# Altium PCB DS134-1.1-B色度传感器.PcbDoc
Units mm, origin at the board's own origin, x right, y up, seen from the top; angles counter-clockwise.
Board outline 42 x 29 mm, 2 copper layers (Top Layer, Bottom Layer), stack 1.671 mm thick; 1 components, 5 nets, 12 pads, 3 vias.
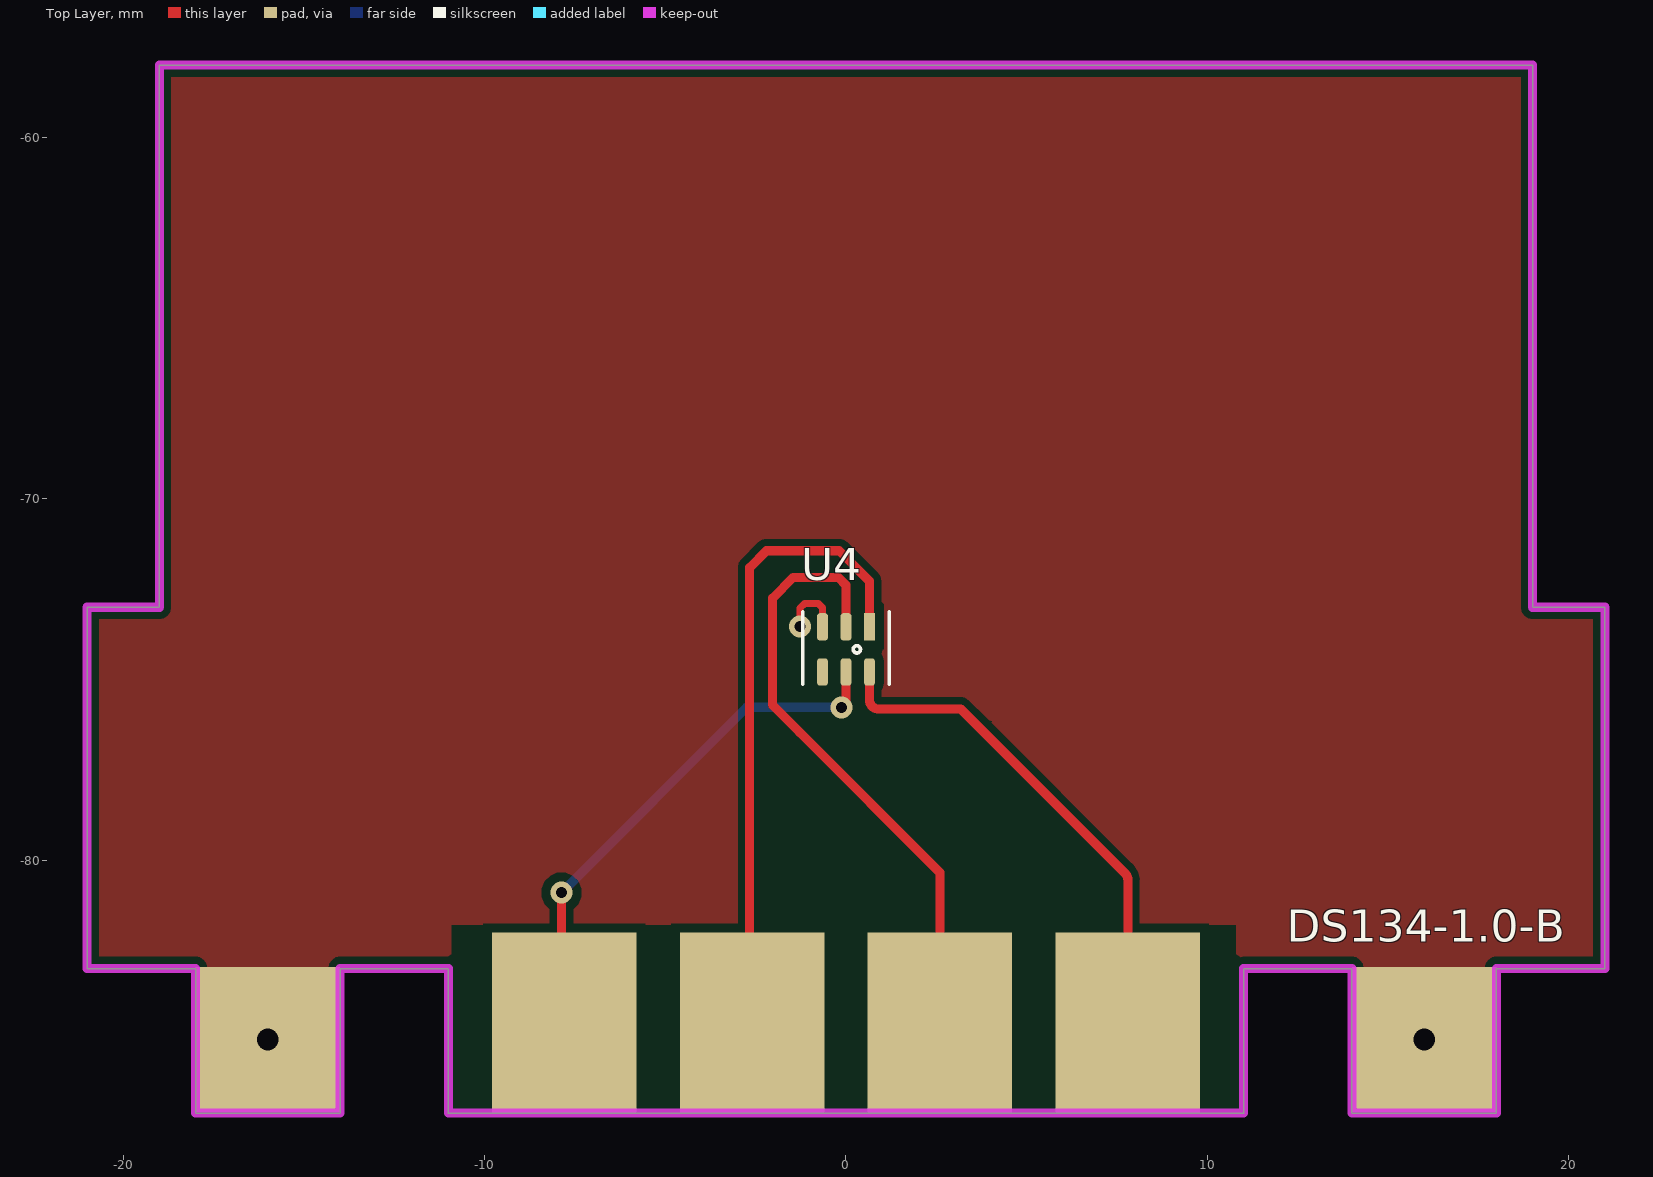
[diagram p0: Top Layer view]
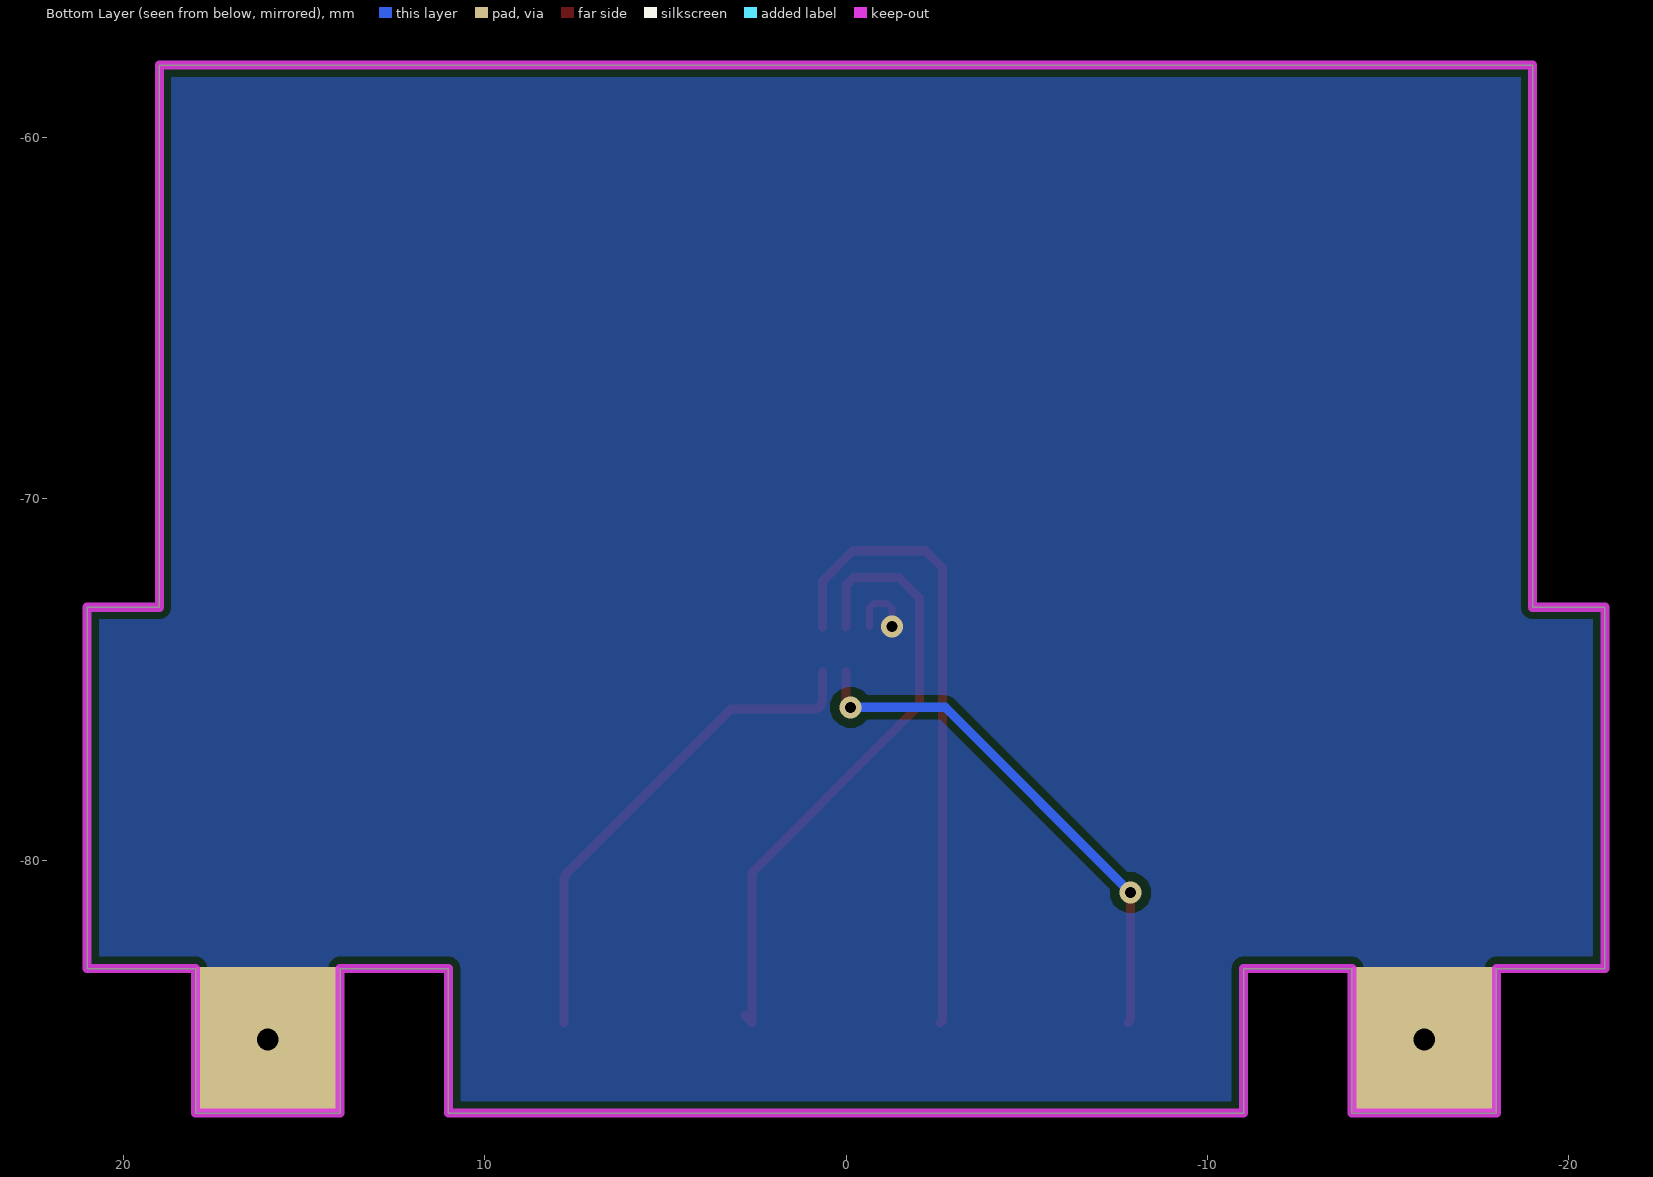
[diagram p1: Bottom Layer view, seen from below]

## Layer stack, top to bottom
Top Solder: solder mask 0.0102, Solder Resist, Dk 3.5
Top Layer: signal copper 0.0356
Dielectric 1: dielectric 1.6, FR-4, Dk 4.8
Bottom Layer: signal copper 0.0356
Bottom Solder: solder mask 0.0102, Solder Resist, Dk 3.5

## Board outline
-21,-83 -18,-83 -18,-87 -14,-87 -14,-83 -11,-83 -11,-87 11,-87 11,-83 14,-83 14,-87 18,-87 18,-83 21,-83 21,-73 19,-73 19,-58 -19,-58 -19,-73 -21,-73

## Design rules (kind name [scope] priority, off if disabled: settings)
Clearance [All] p1: gap=0.2 ignorepadtopadclearanceinfootprint=FALSE except(0: Arc-Hole Track-Hole SMDPad-Hole THPad-Hole Via-Hole Fill-Hole Poly-Hole Region-Hole Text-Hole; 0.15: SMDPad-SMDPad; 0.254: SMDPad-Via SMDPad-Fill SMDPad-Poly SMDPad-Region THPad-THPad THPad-Via THPad-Text Via-Via Via-Fill Via-Poly Via-Region Via-Text Fill-Fill Fill-Poly Fill-Region Fill-Text Poly-Poly Poly-Region Poly-Text Region-Region Region-Text Text-Text)
MinimumSolderMaskSliver [All] p1: minsoldermaskwidth=0.2
PolygonConnect [InNet('GND') vs InNet('GND')] p1: thpad.connectstyle=Relief thpad.reliefconductorwidth=0.508 thpad.reliefentries=4 thpad.polygonreliefangle="90 Angle" thpad.airgapwidth=0.254 smdpad.connectstyle=Relief smdpad.reliefconductorwidth=0.508 smdpad.reliefentries=4 smdpad.polygonreliefangle="90 Angle" smdpad.airgapwidth=0.254 via.connectstyle=Direct via.reliefconductorwidth=0.254 via.reliefentries=4 via.polygonreliefangle="45 Angle" via.airgapwidth=0.254
RoutingVias [All] p1: holewidth=0.6 width=1 viastyle="Through Hole" minholewidth=0.4 minwidth=0.8 maxholewidth=1 maxwidth=2
SilkToSilkClearance [All] p1: silktosilkclearance=0.1
SilkToSolderMaskClearance [IsPad] p1: minsilkscreentomaskgap=0.05 clearancetoexposedcopper=TRUE
SolderMaskExpansion [All] p1: expansion=0.102 istentingtop=FALSE
Width [All] p1: maxlimit=1 minlimit=0.2 preferedwidth=0.2
27 further rules are at their usual default settings.

## Classes and differential pairs
net class U4_Nets: GND I2C1_SCL I2C1_SDA INT VCC_3V3

## Components (designator, comment, footprint, x,y, rotation, side; value= is the part's Value field where it differs from the comment)
U4 "TCS34001FNM" DFN-6(2x2.4) 0,-74.168 r270 top locked

## Footprints (in the part's own frame and the unit in brackets; to place one, negate y for a bottom-side part, rotate by r counter-clockwise, add the part's x,y. Pads: shape width x height; smd on the part's side, far side on the other; paste and mask are expansions set on the pad)
DFN-6(2x2.4) [mm]
  rect 0.75x0.3 smd: 1(-0.625,0.65)
  rrect50% 0.75x0.3 smd: 2(-0.625,0) 3(-0.625,-0.65) 4(0.625,-0.65) 5(0.625,0) 6(0.625,0.65)
  silkscreen extent -1.04,-1.2 0.96,1.2

## Part data
U4: "环境光传感器"

## Free pads (board coordinates)
  rect 4x4 hole 0.6: 0(-16.002,-84.963) 0(16.002,-84.963)
  rect 4x5 smd: 2(-7.8,-84.5) 2(-2.6,-84.5) 2(2.6,-84.5) 2(7.8,-84.5)

## Via types
v1: diameter 0.61, hole 0.305, Top Layer to Bottom Layer, tented both sides, 3 vias

## Nets (pads, with @x,y where several pads share a name; then routed paths per layer and width w, separated by ;. In a path a pad name is that pad's centre, name@x,y a point inside that pad or via, vN(x,y) a via of type N, cw(c..) or ccw(c..) an arc to the next point about the centre after c; other vN are vias at no path point)
GND: pad.0 U4.3 | length 1.8
  Top Layer w0.2: v1(-1.27,-73.533) -1.27,-73.025 -1.143,-72.898 -0.767,-72.898 -0.65,-73.015 U4.3
I2C1_SCL: pad.2@2.6,-84.5 U4.2 | length 17.5
  Top Layer w0.254: U4.2 0,-72.39 -0.214,-72.176 -0.836,-72.176 -1.459,-72.176 -2.032,-72.749 -2.032,-75.714 -1.281,-76.465 2.6,-80.346 2.6,-84.5 pad.2@2.794,-84.306
I2C1_SDA: pad.2@7.8,-84.5 U4.6 | length 14
  Top Layer w0.254: U4.6 0.65,-75.565 ccw(c0.904,-75.565) 0.904,-75.819 3.175,-75.819 7.726,-80.37 cw(c7.546,-80.549) 7.8,-80.549 pad.2@7.8,-84.5
INT: pad.2@-7.8,-84.5 U4.5 | length 14.6
  Top Layer w0.254: v1(-7.874,-80.899) -7.874,-84.426 pad.2@-7.8,-84.5 ; v1@-0.127,-75.819 v1(-0.127,-75.771) -0.127,-75.723 0,-75.596 U4.5
  Bottom Layer w0.254: v1(-7.874,-80.899) -2.746,-75.771 v1(-0.127,-75.771)
VCC_3V3: pad.2@-2.6,-84.5 U4.1 | length 17.7
  Top Layer w0.254: pad.2@-2.6,-84.5 -2.667,-84.433 -2.667,-81.153 -2.667,-71.904 -2.2,-71.437 -0.191,-71.437 0.65,-72.278 U4.1
pads on no net: U4.4

## Polygon pours and split planes (outlines as drawn)
GND on Bottom Layer "GND_L02_P002" (solid, remove dead copper, pour order 2): 13.97,-82.931 13.97,-86.995 18.034,-86.995 18.034,-82.931 20.828,-82.931 20.828,-73.152 18.796,-73.152 18.796,-58.166 -18.796,-58.166 -18.796,-73.152 -20.828,-73.152 -20.828,-82.804 -18.034,-82.804 -18.034,-86.995 -13.97,-86.995 -13.97,-82.931 -13.843,-82.804 -10.795,-82.804 -10.795,-86.868 10.922,-86.868 10.922,-82.931
GND on Top Layer "GND_L01_P003" (solid, remove dead copper, pour order 3): 13.97,-82.931 13.97,-86.995 18.034,-86.995 18.034,-82.931 20.828,-82.931 20.828,-73.152 18.796,-73.152 18.796,-58.166 -18.796,-58.166 -18.796,-73.152 -20.828,-73.152 -20.828,-82.804 -18.034,-82.804 -18.034,-86.995 -13.97,-86.995 -13.97,-82.931 -13.843,-82.804 -10.795,-82.804 -10.795,-86.868 10.922,-86.868 10.922,-82.931

## Keep-outs
Keep-Out Layer:
  the board outline again, w0.254

## Other copper
Top Layer:
  pour cut-out: 10.795,-87 10.795,-81.788 -10.922,-81.788 -10.922,-87
  pour cut-out: 4.053,-76.152 -1.122,-76.152 -1.699,-75.576 -1.699,-72.887 -1.671,-72.887 -1.293,-72.51 -1.16,-72.643 0.784,-72.643 1.054,-72.914 0.983,-72.984 0.983,-75.486

## Silkscreen, mask and mechanical layers (free items; w line width, h text height)
Top Overlay:
  text "DS134-1.0-B" at 12.192,-82.55 h1.52
Mechanical 1:
  the board outline again, w0.254
Mechanical 15:
  circle w0.254: c0,-83.68 r0.6
  circle w0.254: c0,-83.68 r0.6